# Altium PCB lps_display_rev_g.PcbDoc (part 3 of 3)
Units mil, origin at the board's own origin, x right, y up, seen from the top; angles counter-clockwise.
Board outline 5360 x 2470 mil, 2 copper layers (Top Layer, Bottom Layer), stack 6.2 mil thick; 133 components, 82 nets, 460 pads, 128 vias.
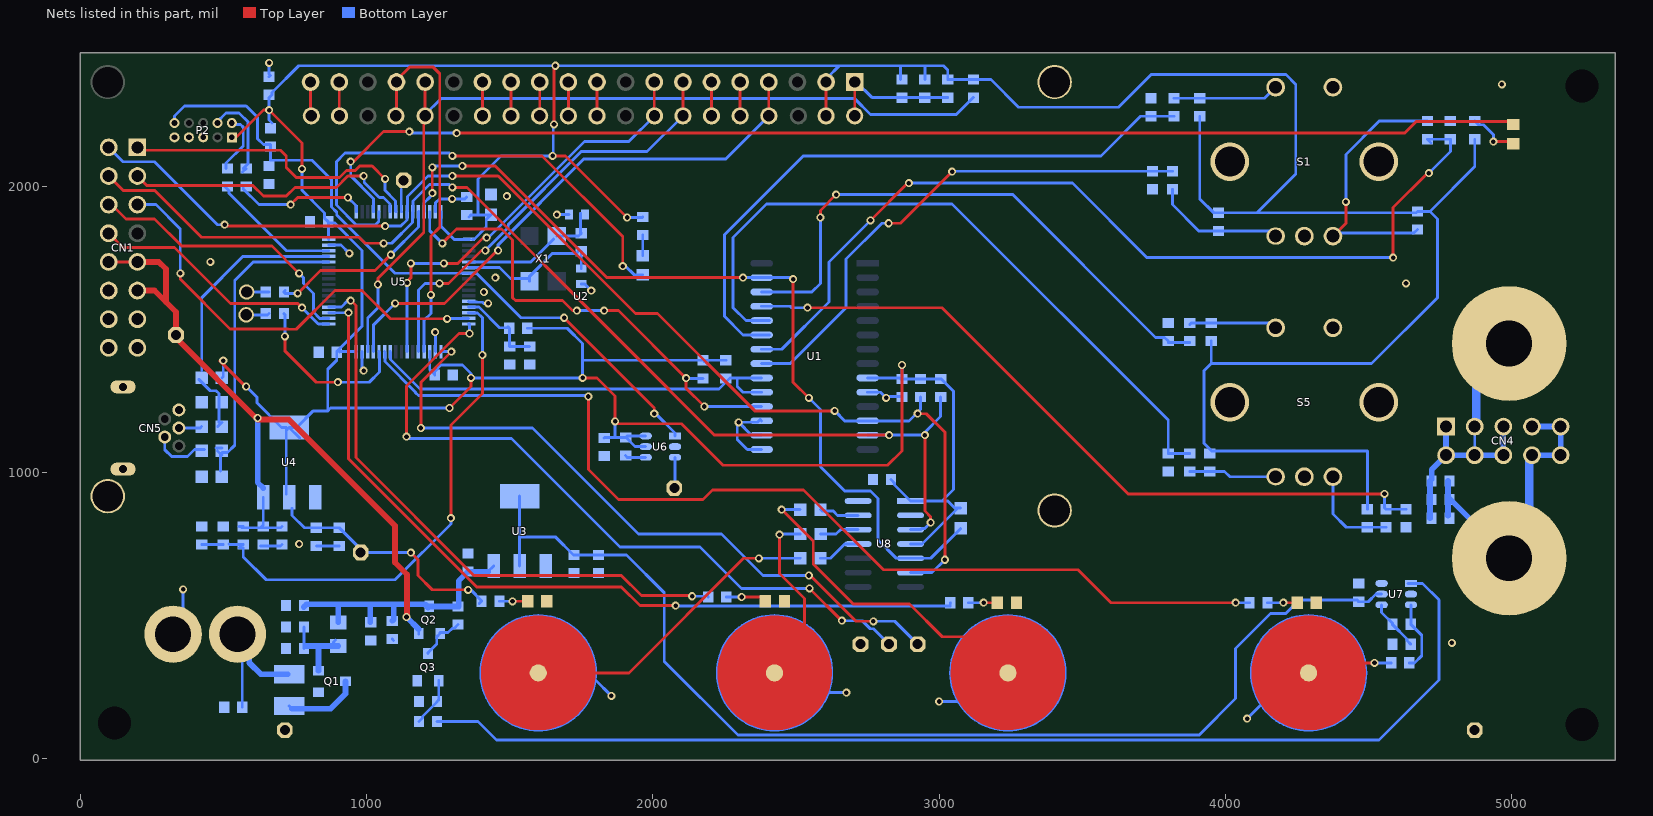
[diagram p2: the nets of this part, all layers, seen from the top]

## Part data (continued)
R33: library part "RES 1M OHM 1/10W 1% 0603", "1M 0603", Case/Package=0603, Case Code (Metric)=1608, Manufacturer=Yageo, Manufacturer Part Number=RC0603FR-071ML, Max Operating Temperature=155°C, Min Operating Temperature=-55°C, Package Quantity=5000, Power Rating=100mW, Supplier Part Number 1=311-1.00MHRCT-ND, Temperature Coefficient=100ppm/°C, Tolerance=±1%, Voltage Rating=50V, Case Code (Imperial)=0603, Category=Resistors, ComponentLink1Description=http://industrial.panasonic.com/www-cgi/jvcr13pz.cgi?E+PZ+3+AOA0002+ERJ3EKF1004V+7+WW, ComponentLink1URL=http://industrial.panasonic.com/www-cgi/jvcr13pz.cgi?E+PZ+3+AOA0002+ERJ3EKF1004V+7+WW, ComponentLink2Description=https://datasheet.ciiva.com/12555/rc0603-272842-12555388.pdf, ComponentLink2URL=https://datasheet.ciiva.com/12555/rc0603-272842-12555388.pdf, ComponentLink3Description=https://datasheet.ciiva.com/7983/443971-7983614.pdf, ComponentLink3URL=https://datasheet.ciiva.com/7983/443971-7983614.pdf, ComponentLink4Description=https://datasheet.ciiva.com/11819/0900766b80f96399-11819295.pdf, ComponentLink4URL=https://datasheet.ciiva.com/11819/0900766b80f96399-11819295.pdf, Composition="Thick Film", Depth=0.8mm, Height=0.45mm, Lead Free="Lead Free", Length=1.6mm, Military Standard=Not, Number of Pins=2, Package / Case=0603, Packaging="Tape and Reel", Pricing 1="1=0.1, 10=0.015, 100=0.006, 1000=0.0027, 2500=0.0023 (USD)", REACH SVHC="No SVHC", Resistance=1M, Resistance (Ohms)=1M, Stock 1=2416528, Supplier 1=Digi-Key, Termination=SMD/SMT, Width=0.8mm
R35 R36: library part CMP-001-0711-04, "Res Thick Film 0603 22 Ohm 5% 1/10W ±100ppm/C Molded SMD Paper T/R", Max Operating Temperature=155°C, Max Power Dissipation=100mW, Min Operating Temperature=-55°C, Package (Imperial)=0603, Package (Metric)=1608, Temperature Coefficient=100ppm/°C, Tolerance=5%, Height=550µm, Length=1.55mm, Mount="Surface Mount", Power=100mW, Power Rating=100mW, Resistance=22, Termination=SMD/SMT, Width=800µm
R37: library part "RES 1K OHM 1% 1/10W 0603", "1.0K 0603", Manufacturer="Stackpole Electronics Inc.", Manufacturer Part Number=RMCF0603FT1K00, Operating Temperature="-55°C ~ 155°C", Package / Case=0603, Power (Watts)="0.1W, 1/10W", Resistance (Ohms)=1k, Supplier Part Number 1=RMCF0603FT1K00CT-ND, Temperature Coefficient=±100ppm/°C, Tolerance=±1%, Category=Resistors, ComponentLink1Description=https://www.seielect.com/Catalog/SEI-RMCF_RMCP.pdf, ComponentLink1URL=https://www.seielect.com/Catalog/SEI-RMCF_RMCP.pdf, Composition="Thick Film", Failure Rate=-, Features="Automotive AEC-Q200", Height - Seated (Max)="0.022\" (0.55mm)", Packaging="Cut Tape (CT)", Part Status=Active, Pricing 1="1=0.1, 10=0.02, 100=0.0081, 1000=0.00364, 2500=0.00316 (USD)", RoHS="RoHS Compliant", Size / Dimension="0.061\" L x 0.031\" W (1.55mm x 0.80mm)", Stock 1=411308, Supplier 1=Digi-Key, Supplier Device Package=0603
R38: library part "RES 4.7K OHM 1/10W 5% 0603 SMD", "4.7K 0603", Manufacturer="Panasonic Electronic Components", Manufacturer Part Number=ERJ-3GEYJ472V, Package / Case=0603, Power (Watts)="0.1W, 1/10W", Resistance (Ohms)=47K, Supplier Part Number 1=P4.7KGCT-ND, Temperature Coefficient=±200ppm/°C, Tolerance=±5%, Category=Resistors, ComponentLink1Description=http://industrial.panasonic.com/www-cgi/jvcr13pz.cgi?E+PZ+3+AOA0001+ERJ3GEYJ472V+7+WW, ComponentLink1URL=http://industrial.panasonic.com/www-cgi/jvcr13pz.cgi?E+PZ+3+AOA0001+ERJ3GEYJ472V+7+WW, Composition="Thick Film", Features="Automotive AEC-Q200 Qualified", Height="0.022\" (0.55mm)", Number of Terminations=2, Packaging="Cut Tape (CT)", Pricing 1="1=0.1, 50=0.0126, 100=0.0096, 250=0.00716, 500=0.00528, 1000=0.00352, 2500=0.00297 (USD)", RoHS="RoHS Compliant", Size / Dimension="0.063\" L x 0.031\" W (1.60mm x 0.80mm)", Stock 1=1261582, Supplier 1=Digi-Key, Supplier Device Package=0603
R46: library part "RES 1K OHM 1% 1/10W 0603", "1.0K 0603", Manufacturer="Stackpole Electronics Inc.", Manufacturer Part Number=RMCF0603FT1K00, Operating Temperature="-55°C ~ 155°C", Package / Case=0603, Power (Watts)="0.1W, 1/10W", Resistance (Ohms)=51k, Supplier Part Number 1=RMCF0603FT1K00CT-ND, Temperature Coefficient=±100ppm/°C, Tolerance=±1%, Category=Resistors, ComponentLink1Description=https://www.seielect.com/Catalog/SEI-RMCF_RMCP.pdf, ComponentLink1URL=https://www.seielect.com/Catalog/SEI-RMCF_RMCP.pdf, Composition="Thick Film", Failure Rate=-, Features="Automotive AEC-Q200", Height - Seated (Max)="0.022\" (0.55mm)", Packaging="Cut Tape (CT)", Part Status=Active, Pricing 1="1=0.1, 10=0.02, 100=0.0081, 1000=0.00364, 2500=0.00316 (USD)", RoHS="RoHS Compliant", Size / Dimension="0.061\" L x 0.031\" W (1.55mm x 0.80mm)", Stock 1=411308, Supplier 1=Digi-Key, Supplier Device Package=0603
R47: library part "RES 1K OHM 1% 1/10W 0603", "1.0K 0603", Manufacturer="Stackpole Electronics Inc.", Manufacturer Part Number=RMCF0603FT1K00, Operating Temperature="-55°C ~ 155°C", Package / Case=0603, Power (Watts)="0.1W, 1/10W", Resistance (Ohms)=1.5K, Supplier Part Number 1=RMCF0603FT1K00CT-ND, Temperature Coefficient=±100ppm/°C, Tolerance=±1%, Category=Resistors, ComponentLink1Description=https://www.seielect.com/Catalog/SEI-RMCF_RMCP.pdf, ComponentLink1URL=https://www.seielect.com/Catalog/SEI-RMCF_RMCP.pdf, Composition="Thick Film", Failure Rate=-, Features="Automotive AEC-Q200", Height - Seated (Max)="0.022\" (0.55mm)", Packaging="Cut Tape (CT)", Part Status=Active, Pricing 1="1=0.1, 10=0.02, 100=0.0081, 1000=0.00364, 2500=0.00316 (USD)", RoHS="RoHS Compliant", Size / Dimension="0.061\" L x 0.031\" W (1.55mm x 0.80mm)", Stock 1=411308, Supplier 1=Digi-Key, Supplier Device Package=0603
R49: library part "RES 1K OHM 1% 1/10W 0603", "1.0K 0603", Manufacturer="Stackpole Electronics Inc.", Manufacturer Part Number=RMCF0603FT1K00, Operating Temperature="-55°C ~ 155°C", Package / Case=0603, Power (Watts)="0.1W, 1/10W", Resistance (Ohms)=1M, Supplier Part Number 1=RMCF0603FT1K00CT-ND, Temperature Coefficient=±100ppm/°C, Tolerance=±1%, Category=Resistors, ComponentLink1Description=https://www.seielect.com/Catalog/SEI-RMCF_RMCP.pdf, ComponentLink1URL=https://www.seielect.com/Catalog/SEI-RMCF_RMCP.pdf, Composition="Thick Film", Failure Rate=-, Features="Automotive AEC-Q200", Height - Seated (Max)="0.022\" (0.55mm)", Packaging="Cut Tape (CT)", Part Status=Active, Pricing 1="1=0.1, 10=0.02, 100=0.0081, 1000=0.00364, 2500=0.00316 (USD)", RoHS="RoHS Compliant", Size / Dimension="0.061\" L x 0.031\" W (1.55mm x 0.80mm)", Stock 1=411308, Supplier 1=Digi-Key, Supplier Device Package=0603
R50: library part "RES 1K OHM 1% 1/10W 0603", "1.0K 0603", Manufacturer="Stackpole Electronics Inc.", Manufacturer Part Number=RMCF0603FT1K00, Operating Temperature="-55°C ~ 155°C", Package / Case=0603, Power (Watts)="0.1W, 1/10W", Resistance (Ohms)=4.7k, Supplier Part Number 1=RMCF0603FT1K00CT-ND, Temperature Coefficient=±100ppm/°C, Tolerance=±1%, Category=Resistors, ComponentLink1Description=https://www.seielect.com/Catalog/SEI-RMCF_RMCP.pdf, ComponentLink1URL=https://www.seielect.com/Catalog/SEI-RMCF_RMCP.pdf, Composition="Thick Film", Failure Rate=-, Features="Automotive AEC-Q200", Height - Seated (Max)="0.022\" (0.55mm)", Packaging="Cut Tape (CT)", Part Status=Active, Pricing 1="1=0.1, 10=0.02, 100=0.0081, 1000=0.00364, 2500=0.00316 (USD)", RoHS="RoHS Compliant", Size / Dimension="0.061\" L x 0.031\" W (1.55mm x 0.80mm)", Stock 1=411308, Supplier 1=Digi-Key, Supplier Device Package=0603
R51 R52 R53 R54: library part "RES 1K OHM 1% 1/10W 0603", "1.0K 0603", Manufacturer="Stackpole Electronics Inc.", Manufacturer Part Number=RMCF0603FT1K00, Operating Temperature="-55°C ~ 155°C", Package / Case=0603, Power (Watts)="0.1W, 1/10W", Resistance (Ohms)=4.7K, Supplier Part Number 1=RMCF0603FT1K00CT-ND, Temperature Coefficient=±100ppm/°C, Tolerance=±1%, Category=Resistors, ComponentLink1Description=https://www.seielect.com/Catalog/SEI-RMCF_RMCP.pdf, ComponentLink1URL=https://www.seielect.com/Catalog/SEI-RMCF_RMCP.pdf, Composition="Thick Film", Failure Rate=-, Features="Automotive AEC-Q200", Height - Seated (Max)="0.022\" (0.55mm)", Packaging="Cut Tape (CT)", Part Status=Active, Pricing 1="1=0.1, 10=0.02, 100=0.0081, 1000=0.00364, 2500=0.00316 (USD)", RoHS="RoHS Compliant", Size / Dimension="0.061\" L x 0.031\" W (1.55mm x 0.80mm)", Stock 1=411308, Supplier 1=Digi-Key, Supplier Device Package=0603
U1: library part mcp23017, "I2C 16 bit Expander"
U3 U4: library part LD1117S33, "3.3 volt fixed regulator, 800mA", Supplier Part Number 1=497-1242-1-ND, Supplier 1=Digi-Key
U7: "CAP QTouch Chip"
U8: "QTouch IC"
X1: library part "CRYSTAL 8MHZ ABM3", "8Mhz ABM3 Parallel Load Crystal", ESR (Equivalent Series Resistance)="200 Ohm", Frequency=8MHz, Frequency Stability=±50ppm, Frequency Tolerance=±20ppm, Load Capacitance=18pF, Manufacturer="Abracon Corporation", Manufacturer Part Number=ABM3B-8.000MHZ-B2-T, Operating Mode=Fundamental, Operating Temperature="-20°C ~ 70°C", Package / Case="4-SMD, No Lead (DFN, LCC)", Ratings=-, Supplier Part Number 1=535-9720-1-ND, Category="Crystals and Oscillators", ClassName="Master Clock", ComponentLink1Description=http://www.abracon.com/Resonators/abm3b.pdf, ComponentLink1URL=http://www.abracon.com/Resonators/abm3b.pdf, Height="0.043\" (1.10mm)", Mounting Type="Surface Mount", Packaging="Cut Tape (CT)", Pricing 1="1=1.04, 10=0.92, 50=0.8588, 100=0.76, 500=0.7182 (USD)", RoHS="RoHS Compliant", Size / Dimension="0.197\" L x 0.126\" W (5.00mm x 3.20mm)", Stock 1=22545, Supplier 1=Digi-Key, Type="MHz Crystal"

## Free pads (board coordinates)
  round 110 hole 115 unplated: 0(120,125) 0(5245,120) 0(5245,2350)

## Via types
v1: diameter 28, hole 16, Top Layer to Bottom Layer, 128 vias

## Nets (pads, with @x,y where several pads share a name; then routed paths per layer and width w, separated by ;. In a path a pad name is that pad's centre, name@x,y a point inside that pad or via, vN(x,y) a via of type N, cw(c..) or ccw(c..) an arc to the next point about the centre after c; other vN are vias at no path point)
3V3: 3V3.1 C1.1 C2.1 C3.1 C4.1 C14.1 C15.1 C21.1 C22.1 C23.1 C24.1 C25.1 C26.1 C33.1 C43.1 FB2.1 P2.1 R5.2 R6.2 R7.2 R8.2 R9.2 R10.2 R11.2 R14.2 R15.2 R16.2 R21.2 R26.2 R31.1 R32.2 R38.2 R47.2 R48.2 R54.1 U1.9 U2.2 U4.2 U4.4 U5.1 U5.19 U5.32 U5.48 U5.64 U6.5 U6.6 U8.1 U8.4 | length 18276.7
  Top Layer w10: v1@487.72,1390 v1@571.36,1306.36 ; P2.1@545,2170 640,2265 v1(660,2265) 775,2150 v1(775,2060) ; v1(1155,720) 1180,695 1180,640 1230,590 v1(1355,590) ; v1(1290,1225) 1365,1300 v1(1365,1330) ; v1(1650,2105) 1695,2105 v1(1910,1890) ; v1(1655,2215) 1655,2415 v1(1660,2420) ; v1(1755,1330) 1805,1330 1868.25,1266.75 v1(1868.25,1178.25) 1876.5,1170 2100,1170 2245,1025 2820,1025 2870,1075 v1(2870,1375)
  Bottom Layer w10: R47.2@495.43,1330 500,1334.57 v1(500,1390) ; v1(580,1300) 617.5,1262.5 617.5,1242.97 703.42,1157.05 U4.4@720,1157.05 ; 670,2220 660,2230 v1(660,2265) 660,2308.5 670,2318.5 670,2326.54 763.46,2420 v1(1660,2420) 2650.86,2420 ; U4.2@720,925 720,1147.05 U4.4@730,1157.05 ; U4.2@740,875 740,850 783.5,806.5 C15.1@825,806.5 C14.1@905,806.5 980,731.5 980,725.75 985.75,720 v1(1155,720) ; U4.4@767.32,1119.72 U4.4@730,1157.05 ; v1(775,2060) 775,1985 853.78,1906.22 853.78,1887.72 C25.1@866.5,1875 866.5,1873.03 C25.1@867.64,1871.89 ; U5.48@868.54,1813.54 867.64,1814.45 C25.1@867.64,1871.89 ; C24.1@906.5,1420 908.31,1421.81 U5.32@965,1421.81 ; U5.19@1220.9,1421.81 1220.9,1359.57 C26.1@1238.5,1341.97 ; C26.1@1238.5,1340 C26.1@1238.5,1341.97 ; U5.64@1260.28,1910 1260.28,1859.72 1306.46,1813.54 U5.1@1356.73,1813.54 1359.16,1813.54 U5.1@1360,1814.38 ; v1(1290,1225) 875,1225 865,1215 ; v1(1355,590) 1363.98,590 1402.01,551.97 R21.2@1402.01,550 R21.2@1393.78,541.77 ; C23.1@1358.33,1892.15 1364.37,1898.19 1390,1898.19 ; U5.1@1370,1813.75 1375.52,1813.75 1418.35,1856.58 1418.35,1882.91 C22.1@1433.62,1898.19 ; C22.1@1435,1899.57 C22.1@1433.62,1898.19 ; FB2.1@1561.5,1503.5 1701.5,1503.5 1755,1450 1755,1395 ; v1(1655,2215) 1652.5,2212.5 1652.5,2107.5 v1(1650,2105) 1470,2105 1390,2025 1390,1898.19 ; C33.1@1830,1120 1831.5,1121.5 1868.25,1121.5 ; v1(1868.25,1178.25) 1868.25,1121.5 ; v1(1910,1890) 1963.5,1890 R26.2@1965,1891.5 ; U6.5@1975,1090 1938.35,1090 1931.28,1097.07 1931.28,1097.19 1906.97,1121.5 R38.2@1905,1121.5 ; U6.6@1975,1127.4 1910.91,1127.4 R38.2@1905,1121.5 ; R11.2@2175,1391.5 1758.5,1391.5 1755,1395 ; R11.2@2180,1386.5 2185,1391.5 R8.2@2255,1391.5 ; U2.2@2610,2365 2610,2379.14 2650.86,2420 ; U1.9@2750.08,1330 2865,1330 2865,1326.5 C1.1@2870,1326.5 R10.2@2935,1326.5 R9.2@3005,1326.5 3006.97,1326.5 3050,1283.46 3050,940 3010,900 ; C43.1@2831.5,975 2844.21,962.28 2844.21,955.79 U8.1@2900,900 3010,900 ; C4.1@2865,2371.5 2865,2420 ; C1.1@2870,1330 v1(2870,1375) ; U8.4@2900,750 2939.79,750 R54.1@3065.22,875.43 ; C2.1@2950,2371.5 2950,2420 ; R54.1@3075,875.43 R54.1@3065.22,875.43 ; R48.2@3120,2371.5 R48.2@3121.97,2371.5 ; R6.2@3910,2243.5 3910,1955 3958.5,1906.5 R7.2@3975,1906.5 4110,1906.5 ; R15.2@3950,1458.5 3950,1380 ; R14.2@4495,871.5 4495,1075 3951.5,1075 3925,1101.5 3925,1355 3950,1380 ; R32.2@4870,2163.5 4870,2067.99 4713.5,1911.5 ; U4.4@730,1157.05 756.57,1157.05 814.53,1215 865,1215 ; 865,1215 865,1360 896.5,1391.5 C24.1@896.5,1420 896.5,1421.97 985,1510.47 985,1775 888.11,1871.89 C25.1@867.64,1871.89 ; C26.1@1238.5,1341.97 1238.5,1353.5 1260,1375 1335,1375 1365,1345 v1(1365,1330) v1(1755,1330) 1755,1395 ; 1390,1898.19 C22.1@1433.62,1898.19 ; 1868.25,1121.5 R38.2@1905,1121.5 ; 2650.86,2420 2865,2420 ; 2865,2420 2950,2420 ; 2950,2420 3015,2420 3030,2405 C3.1@3030,2371.5 R48.2@3121.97,2371.5 ; 3010,900 3030,900 3054.57,875.43 R54.1@3065.22,875.43 ; R48.2@3121.97,2371.5 3180.51,2371.5 3277.01,2275 3625.87,2275 3740.37,2389.5 4210.5,2389.5 4245,2355 4245,2041.5 4110,1906.5 ; 3950,1380 4510,1380 4740,1610 4740,1885 4713.5,1911.5 ; 4110,1906.5 4665,1906.5 R5.2@4670,1911.5 4713.5,1911.5
8MH_XTAL1: C20.1 R33.1 U5.5 X1.3 | length 491.3
  Bottom Layer w10: U5.5@1356.93,1735 U5.5@1356.73,1734.8 1574.29,1734.8 ; 1574.04,1735.06 X1.3@1653.78,1814.8 ; X1.3@1664.49,1825 1740,1825 R33.1@1750,1835 1747.56,1837.44 1747.56,1905
8MH_XTAL2: C19.1 R33.2 U5.6 X1.1 | length 521.8
  Bottom Layer w10: U5.6@1356.73,1715.12 1464.88,1715.12 1502.48,1677.52 X1.1@1570,1677.52 ; X1.1@1570,1667.52 X1.1@1570,1677.52 ; C19.1@1750,1712.56 R33.2@1750,1772.01 1740,1772.01 1732.99,1765 1650,1765 1570,1685 X1.1@1570,1677.52
+VIN: C8.1 C9.1 C10.1 C34.1 FB1.2 Q2.3 R1.2 U3.3 | length 978.4
  Bottom Layer w10: C9.1@1013.03,476.5 C9.1@1015,476.5 ; C10.1@1090,485 C10.1@1090,492.5 ; Q2.3@1220,532.24 Q2.3@1220.75,531.5 ; R1.2@1320,531.5 R1.2@1321.97,531.5 ; U3.3@1425,653.5 U3.3@1444.45,672.95
  Bottom Layer w20: C8.1@781.5,530 791.5,540 901.64,540 ; FB1.2@901.64,476.57 901.64,540 ; C9.1@1013.03,476.5 1013.03,536.97 1010,540 ; C10.1@1090,481.5 1095,486.5 1095,540 ; Q2.3@1215,527.24 1215,530.2 1208.27,536.93 1205.31,536.93 1202.24,540 1095,540 ; Q2.3@1220.75,531.5 R1.2@1320,531.5 ; R1.2@1321.97,531.5 1321.97,620.47 C34.1@1355,653.5 U3.3@1425,653.5 ; 901.64,540 1010,540 ; 1010,540 1095,540
+VIN_SW: +VIN_SW.1 C12.1 C13.1 CN1.5 CN1.6 CN1.13 CN1.14 Q2.2 R23.2 U4.3 | length 2553.4
  Top Layer w10: CN1.13@100,1735 CN1.5@200,1735 ; v1(1140,495) v1@1141.4,496.4
  Top Layer w20: CN1.6@200,1635 260,1635 300,1595 ; CN1.5@200,1735 275,1735 300,1710 300,1595 ; v1@1141.4,496.4 1141.4,643.6 1100,685 1100,813.89 728.89,1185 620,1185 335,1470 +VIN_SW.1@335,1480 335,1560 300,1595
  Bottom Layer w10: R23.2@555,811.5 R23.2@570,811.5 ; R23.2@565,806.5 C13.1@630,806.5 ; U4.3@639.45,912.95 639.45,815.94 C13.1@630,806.5 ; C12.1@705,811.5 700,806.5 C13.1@630,806.5 ; Q2.2@1182.6,434.8 Q2.2@1182.6,437.76 Q2.2@1182.6,452.4
  Bottom Layer w20: v1(620,1190) 620,965 U4.3@640,945 ; v1(1140,495) Q2.2@1182.6,452.4
/CAP_T_INT: R54.2 U1.27 U5.61 U8.5 | length 3022.3
  Top Layer w10: v1(1230,1975) v1(1230,2065) ; v1(1335,2070) 1450,2070 1840,1680 v1(2315,1680) ; v1(2490,1675) 2490,1315 v1(2545,1260)
  Bottom Layer w10: U5.61@1201.22,1910 1201.22,1941.17 1222.67,1962.62 ; v1(1230,2065) 1235,2070 v1(1335,2070) ; v1(2315,1680) U1.27@2380,1680 2485,1680 v1(2490,1675) ; v1(2545,1260) 2585,1220 2585,1020 2670,935 2760,935 2785.95,909.05 2785.95,764.05 2850,700 U8.5@2900,700 2970.43,700 R54.2@3075,804.57
/INT: R8.1 U1.19 U1.20 U5.26 | length 1506.2
  Bottom Layer w10: U5.26@1083.11,1421.81 1084.02,1420.91 1084.02,1394.09 1187.11,1291 2231,1291 2270,1330 2295,1330 ; U1.19@2380,1280 2315,1280 2295,1300 2295,1330 ; U1.20@2380,1330 2295,1330
/RST_MCP23017: R11.1 U1.18 U5.62 | length 1718.9
  Top Layer w10: v1(1265,1800) 1315,1850 1471.77,1850 1510,1811.77 1510,1610 1520,1600 1685,1600 1720,1565 v1(1735,1565) ; v1(1830,1565) 1880,1565 v1(2116.19,1328.81) 2116.19,1293.81 v1(2180,1230)
  Bottom Layer w10: U5.62@1220.9,1910 1220.9,1844.09 v1(1265,1800) ; v1(1735,1565) v1(1830,1565) ; v1@2115.88,1329.12 v1(2116.19,1328.81) 2116.5,1328.5 R11.1@2175,1328.5 ; v1(2180,1230) U1.18@2380,1230
/RST_OLED: R48.1 U2.16 U5.30 | length 2906.1
  Top Layer w10: v1(1040,1656.25) 1040,1678.23 1200,1838.23 1200,2240 U2.16@1205,2244.99 U2.16@1205,2255
  Bottom Layer w10: U5.30@1004.37,1421.81 1004.37,1539.37 1040,1575 v1(1040,1656.25) ; U2.16@1205,2244.99 1205,2250 1260,2305 2705,2305 2760,2250 3059.53,2250 3118.03,2308.5 R48.1@3120,2308.5
Current_Limit: CN1.11 U5.34 | length 982.8
  Top Layer w10: CN1.11@100,1935 110,1935 160,1885 260,1885 355,1790 670,1790 v1(765,1695)
  Bottom Layer w10: v1(765,1695) 780,1680 780,1660 815,1625 815,1560 837.05,1537.95 U5.34@868.54,1537.95
D/C_OLED: U2.4 U5.29 | length 1787.6
  Top Layer w10: v1(1100,1590) 1272.02,1590 1457.02,1775 v1(1460,1775)
  Bottom Layer w10: U5.29@1024.06,1421.81 1024.06,1514.05 v1(1100,1590) ; v1(1460,1775) 1460,1794.96 1760.04,2095 2255,2095 U2.4@2405,2244.99
DEBUG_LED: LED2.2 U5.53 | length 1685.7
  Top Layer w10: v1(1300,2105) 1613.23,2105 1895,1823.23 v1(1895,1720)
  Bottom Layer w10: U5.53@1043.74,1910 1042.83,1909.09 1042.83,1875.86 1031.98,1865 963.5,1865 895,1933.5 895,2085 925,2115 1290,2115 v1(1300,2105) ; v1(1895,1720) 1905,1720 1935,1690 LED2.2@1965,1690
GND: C1.2 C2.2 C3.2 C4.2 C7.2 C8.2 C9.2 C10.2 C11.2 C12.2 C13.2 C14.2 C15.2 C16.2 C17.2 C18.2 C19.2 C20.2 C21.2 C22.2 C23.2 C24.2 C25.2 C26.2 C27.2 C28.2 C29.2 C30.2 C31.2 C32.2 C33.2 C34.2 C36.2 C37.2 C39.2 C40.2 C41.2 C43.2 CN1.7 CN1.8 CN1.15 CN1.16 CN5.0 CN5.5 CS1.2 CS2.2 CS3.2 CS4.2 GND1.1 GND2.1 GND3.1 LED1.2 LED4.2 LED5.2 LED6.2 P1.1 P2.5 P2.7 P2.9 Q1.1 Q3.2 R12.2 R18.1 R37.1 R46.1 R49.1 S1.2 S1.4 S1.5 S1.7 S5.2 S5.4 S5.5 S5.7 U1.10 U1.15 U1.16 U1.17 U2.1@96.73,916.88 U2.1@2705,2244.99 U2.1@2705,2363.1 U2.1@3403.19,867.04 U2.1@3403.19,2363.1 U2.5 U2.6 U2.10 U2.11 U2.12 U2.13 U2.14 U2.19 U2.20 U3.1 U4.1 U5.12 U5.18 U5.31 U5.47 U5.63 U6.2 U7.2 U7.6 U8.2 U8.14 | length 2278
  Bottom Layer w10: P1.1@335,435 335,466.62 360,491.62 v1(360,591.62) ; C13.2@630,743.5 700,743.5 C12.2@705,748.5 ; C21.2@660,2381.5 665,2386.5 660,2391.5 v1(660,2430) ; C15.2@825,743.5 C14.2@905,743.5 ; U5.47@868.54,1793.86 911.14,1793.86 v1(940,1765) ; U5.31@984.68,1421.81 984.68,1360.32 v1(990,1355) ; C10.2@1090,418.5 C10.2@1095,413.5 ; v1(1240,1490) 1240.59,1489.41 U5.18@1240.59,1421.81 ; U5.63@1240.59,1910 1241.5,1910.91 1241.5,1941.5 1255,1955 v1(1299.25,1955) 1343.5,1955 C23.2@1350,1961.5 ; U5.12@1356.73,1597.01 1358.51,1595.23 1385.32,1595.23 1386.23,1594.32 1404.72,1594.32 1409.04,1590 v1(1425,1590) ; CS4.2@1600,300 1645,300 1650,300 1700,300 1750,300 1775,300 ; v1(1665,1900) C20.2@1707.44,1900 ; C19.2@1750,1657.44 1762.56,1657.44 v1(1785,1635) ; 1798.6,276.4 v1(1855,220) ; v1@2295,1170 2295,1115 2330,1080 U1.15@2380,1080 ; U1.16@2380,1130 2345,1130 v1(2300,1175) 2365,1175 2375,1185 U1.17@2380,1180 ; 2610,225 2610.68,225.68 2616,231 v1(2676,231) v1@2680,235 ; U2.1@2710,2365 2766.5,2308.5 C4.2@2870,2308.5 C2.2@2950,2308.5 C3.2@3030,2308.5 ; U1.10@2750.08,1280 2795,1280 v1(2815,1260) 2820,1265 C1.2@2865,1265 ; v1(3000,200) 3066.79,200 3070,200 3090,200 ; v1(4075,140) 4123.78,188.78 4135,200 4140,200 4190,200
  other v1: 4790,405 765,750 1410,1630 4630,1660 1450,1680 455,1735 1490,1965 4965,2355
I2C_SCL: CN1.9 R10.1 U1.12 U5.58 U8.6 | length 4207.1
  Top Layer w10: CN1.9@100,2120.93 CN1.9@100,2135 ; v1@500,1865 505,1860 v1(1065,1860) ; v1(1300,2035) 1460,2035 1940,1555 2015.88,1555 2355.88,1215 v1(2635,1215) ; v1(2925,1205) 2955,1205 3020,1140 v1(3020,695)
  Bottom Layer w10: CN1.9@100,2135 150,2085 260,2085 480,1865 v1(505,1865) ; v1(1065,1860) 1120,1860 1141.26,1881.26 1141.26,1909.09 U5.58@1142.16,1910 1143.07,1910.91 1143.07,1963.07 1215,2035 v1(1300,2035) ; v1(2635,1215) 2670,1180 U1.12@2750.08,1180 2895,1180 2935,1220 R10.1@2935,1263.5 ; U8.6@2900,650 2975,650 v1(3020,695)
I2C_SDA: CN1.10 R9.1 U1.13 U5.59 U8.3 | length 4062.4
  Top Layer w10: CN1.10@100,2035 150,1985 260,1985 424,1821 974,1821 995,1800 v1(1060,1800) ; v1(1300,1995) 1350.81,1995 1893.1,1452.71 2215.81,1130 v1(2825,1130) ; v1(2950,1130) 2950,865 2970,845 v1(2970,825)
  Bottom Layer w10: v1(1060,1800) 1088.45,1800 1160.94,1872.5 1160.94,1909.09 1162.76,1910.91 1162.76,1947.5 1220.25,2005 1290,2005 v1(1300,1995) ; U1.13@2750.08,1130 v1(2825,1130) v1(2950,1130) 2950,1140 3005,1195 R9.1@3005,1263.5 ; U8.3@2900,800 2934.54,800 2939.02,804.47 2949.47,804.47 v1(2970,825)
I_ENC_A: C31.1 R27.2 U1.24 | length 2463.6
  Bottom Layer w10: U1.24@2407.56,1530 U1.24@2380,1530 2325,1530 2280,1575 2280,1820 2397.5,1937.5 3045,1937.5 3800,1182.5 C31.1@3800,1066.5 R27.2@3875,1066.5
I_ENC_B: C27.1 R28.2 U1.25 | length 2616.9
  Top Layer w10: v1(2540,1575) 3010,1575 3660,925 v1(4555,925)
  Bottom Layer w10: U1.25@2380,1580 2480,1580 2485,1575 v1(2540,1575) 2495,1575 ; v1(4555,925) 4555,876.5 R28.2@4560,871.5 C27.1@4630,871.5
I_ENC_SW: C39.1 R45.1 U1.26 | length 1997.1
  Top Layer w10: v1(2585,1890) 2585,1915 v1(2640,1970)
  Bottom Layer w10: U1.26@2380,1630 2555,1630 2585,1660 v1(2585,1890) ; v1(2640,1970) 3257.08,1970 3755.86,1471.22 3787.28,1471.22 C39.1@3800,1458.5 ; C39.1@3800,1453.5 R45.1@3875,1453.5
I_Sample: CN1.3 U5.15 | length 1538.9
  Top Layer w10: v1(350,1695) 350,1675 524,1501 725.77,1501 726.77,1500 755,1500 890,1635 985,1635 1083.52,1536.48 v1(1281.48,1536.48)
  Bottom Layer w10: CN1.3@200,1935 265,1935 350,1850 v1(350,1695) ; v1@1280,1535 v1(1281.48,1536.48) 1282.95,1537.95 U5.15@1356.73,1537.95
MEM1_LED: R3.1 U5.35 | length 2906.8
  Top Layer w10: v1(937.36,1557.64) 937.36,1047.64 1385,600 1890,600 1955,535 v1(2080,535)
  Bottom Layer w10: U5.35@868.54,1557.64 v1(937.36,1557.64) ; v1(2080,535) 2081.69,533.31 3038.5,533.31 R3.1@3038.5,545 R3.1@3040,543.5
MEM2_LED: R4.1 U5.36 | length 2068.1
  Top Layer w10: v1(945,1600) 946.01,1600 963.36,1582.65 963.36,1051.64 1375,640 1890,640 1960,570 v1@2132.5,570
  Bottom Layer w10: U5.36@868.54,1577.32 912.32,1577.32 935,1600 v1(945,1600) ; v1(2137.5,567.5) 2191,567.5 R4.1@2193.5,565
Net1_1: 1.1 U5.57 | length 78.8
  Bottom Layer w10: 1121.57,1988.43 1121.57,1910.91 U5.57@1122.48,1910
Net/MR_1: /MR.1 U6.3 | length 108.6
  Bottom Layer w10: /MR.1@2075,945 2077.36,947.36 U6.3@2077.36,1052.6
NetBOOT1_1: BOOT1.1 R25.1 | length 78.5
  Bottom Layer w10: BOOT1.1@581.5,1630 R25.1@660,1630
NetBOOT2_1: BOOT2.1 R34.2 | length 75.6
  Bottom Layer w10: BOOT2.1@586.5,1550 655,1550 R34.2@660,1555
NetC5_1: C5.1 C6.1 CN4.1 CN4.2 CN4.3 CN4.6 CN4.7 CN4.8 J2.1 R17.2 | length 1303.7
  Bottom Layer w10: C6.1@4713.5,970 C6.1@4720,976.5 ; CN4.7@4870,1060 CN4.2@4870,1160 ; J2.1@4875,1370 5050,1545 5090,1545 J2.1@5035,1490
  Bottom Layer w20: R17.2@4713.5,840 4713.5,905 C6.1@4713.5,970 ; C6.1@4720,976.5 4720,1010 CN4.6@4770,1060 ; CN4.1@4770,1160 CN4.6@4770,1060 ; CN4.3@4970,1160 CN4.8@4970,1060 CN4.7@4870,1060 CN4.6@4770,1060
  Bottom Layer w30: CN4.2@4875,1175 J2.1@4875,1370
NetC5_2: C5.2 C6.2 CN4.4 CN4.5 CN4.9 CN4.10 J1.1 R17.1 | length 1111.1
  Bottom Layer w10: C5.2@4776.5,905 C5.2@4785,905 ; J1.1@4990,700 J1.1@5060.05,770.05 ; CN4.9@5060.05,1050.05 CN4.9@5070,1060
  Bottom Layer w20: R17.1@4776.5,848.5 C5.2@4776.5,903.03 ; C5.2@4776.5,905 C6.2@4776.5,970 ; C5.2@4785,905 J1.1@4990,700 ; CN4.9@5070,1060 CN4.10@5170,1060 CN4.5@5170,1160 CN4.4@5070,1160
  Bottom Layer w30: J1.1@5060.05,770.05 CN4.9@5060.05,1050.05
NetC7_1: C7.1 C11.1 FB1.1 Q1.2 | length 298
  Bottom Layer w10: C11.1@781.5,460 C7.1@781.5,385 C7.1@790.38,393.89 ; 830,393.89 832.76,391.13 ; FB1.1@884.22,406.39 FB1.1@892.35,414.52
  Bottom Layer w20: C7.1@790.38,393.89 830,393.89 FB1.1@901.64,393.89 ; Q1.2@832.76,307.4 832.76,391.13
NetC16_1: C16.1 C41.1 R18.2 U3.2 U3.4 U7.5 | length 3993
  Bottom Layer w10: U3.2@1535,672.95 1535,775 ; U3.4@1535,917.05 1535,775 ; U7.5@4545,575 4525,575 4498.5,548.5 C41.1@4465,548.5 4458.5,555 4257.98,555 4210,507.02 4157.02,507.02 4035,385 4035,210 3908,83 2297,83 2040,340 2040,580 1908.5,711.5 R18.2@1810,711.5 C16.1@1725,711.5 1723.03,711.5 1659.53,775 1535,775
NetC17_1: C17.1 C18.1 FB2.2 U5.13 | length 302.9
  Bottom Layer w10: U5.13@1356.73,1577.32 1392.68,1577.32 1465,1505 FB2.2@1488.5,1505 ; FB2.2@1493.5,1508.5 FB2.2@1498.5,1503.5 1500,1502.01 C17.1@1500,1440 C18.1@1570,1440
NetC42_1: C42.1 R49.2 U7.4 | length 179.6
  Bottom Layer w10: U7.4@4545,537.6 4545,510.47 4583.5,471.97 C42.1@4583.5,470 4583.5,468.03 4633.78,417.76 4633.78,412.72 R49.2@4646.5,400
NetC42_2: C42.2 R50.2 U7.3 | length 247.8
  Bottom Layer w10: R50.2@4641.5,335 4660,335 4685,360 4685,431.5 C42.2@4646.5,470 4647.36,470.87 U7.3@4647.36,537.6
NetCN5_2: CN5.2 R35.1 | length 203.9
  Bottom Layer w10: CN5.2@295.67,1123.5 295.67,1079.33 320,1055 374.57,1055 399.57,1080 R35.1@435,1080
NetCN5_3: CN5.3 R36.1 | length 81.8
  Bottom Layer w10: CN5.3@344.88,1155 419.57,1155 R36.1@424.57,1160
NetCS1_1: CS1.1 R50.1 | length 203
  Top Layer w10: 4390,300 4425,335 v1(4520,335)
  Bottom Layer w10: v1(4520,335) R50.1@4578.5,335
NetCS2_1: CS2.1 R51.1 | length 1032.4
  Top Layer w10: v1(2450,870) 2560,760 2560,680 2700,540 2896.77,540 3010.88,425.88 3092.61,425.88 3159.36,359.14
  Bottom Layer w10: v1(2450,870) R51.1@2514.57,870
NetCS3_1: CS3.1 R52.1 | length 594.4
  Top Layer w10: v1(2442.5,782.5) 2442.5,647.5 2530,560 2530,305 2525,300
  Bottom Layer w10: v1(2442.5,782.5) 2445,785 R52.1@2515,785
NetCS4_1: CS4.1 R53.1 | length 980.3
  Top Layer w10: 1700,300 1916.77,300 2316.77,700 v1(2370,700)
  Bottom Layer w10: v1(2370,700) R53.1@2514.57,700
NetF1_1: F1.1 P1.2 R46.2 | length 571
  Bottom Layer w10: P1.2@550,370 P1.2@550,435 P1.2@566.5,418.5 ; R46.2@566.5,180 P1.2@566.5,418.5 ; P1.2@590.6,394.4 P1.2@566.5,418.5
  Bottom Layer w20: P1.2@590.6,394.4 590.6,335.6 631.32,294.88 F1.1@725,294.88
NetF1_2: F1.2 Q1.3 | length 265.7
  Bottom Layer w10: F1.2@730,184.88 F1.2@739.88,175
  Bottom Layer w20: F1.2@739.88,175 875,175 927.24,227.24 Q1.3@927.24,270
NetLED1_1: LED1.1 R21.1 | length 98.1
  Top Layer w10: v1(1510,550) LED1.1@1563.07,550
  Bottom Layer w10: R21.1@1465,550 v1(1510,550)
NetLED2_1: LED2.1 R26.1 | length 71.6
  Bottom Layer w10: LED2.1@1965,1756.93 R26.1@1965,1828.5
NetLED3_1: LED3.1 R32.1 | length 182.1
  Top Layer w10: v1(4935,2155) 4998.07,2155 LED3.1@5005,2148.07
  Bottom Layer w10: R32.1@4870,2226.5 4882.72,2213.78 4901.22,2213.78 4935,2180 v1(4935,2155)
NetLED4_1: LED4.1 R3.2 | length 101.6
  Top Layer w10: v1(3155,545) LED4.1@3203.07,545
  Bottom Layer w10: R3.2@3101.5,545 v1(3155,545)
NetLED5_1: LED5.1 R4.2 | length 141.6
  Top Layer w10: v1(2310,565) LED5.1@2398.07,565
  Bottom Layer w10: R4.2@2256.5,565 v1(2310,565)
NetLED6_1: LED6.1 R13.2 | length 101.6
  Top Layer w10: v1(4201.93,545) LED6.1@4250,545
  Bottom Layer w10: R13.2@4146.5,545 v1@4200,545
NetP2_2: P2.2 R30.1 | length 214.6
  Bottom Layer w10: R30.1@510,2061.5 510,2080 570,2140 570,2205 559.78,2215.22 534.78,2215.22 P2.2@530,2220
NetP2_4: P2.4 R29.1 | length 324.4
  Bottom Layer w10: P2.4@477.5,2222.5 510,2255 555,2255 587,2223 587,2078.5 R29.1@570,2061.5 ; R29.1@567.5,2049 R29.1@580,2061.5 R29.1@578.03,2061.5
NetQ2_1: Q2.1 Q3.3 R1.1 | length 165.1
  Bottom Layer w10: Q3.3@1215,367.24 1215,370.2 1245.67,400.87 1245.67,426.02 Q2.1@1257.4,437.76 1257.4,440.71 1285,440.71 1300.08,455.79 1307.28,455.79 R1.1@1320,468.5
NetQ3_1: Q3.1 R2.1 R12.1 | length 171.3
  Bottom Layer w10: R2.1@1183.5,130 1196.22,142.72 1196.22,147.76 1246.5,198.03 R12.1@1246.5,200 1252.4,205.91 Q3.1@1252.4,272.76
NetR2_2: R2.2 U7.1 | length 4022.8
  Bottom Layer w10: R2.2@1246.5,130 1390,130 1454,66 4536,66 4745,275 4745,555 4687.6,612.4 U7.1@4647.36,612.4 U7.1@4637.52,612.4
NetR5_1: R5.1 R43.1 S1.3 | length 941.6
  Top Layer w10: S1.3@4375,1825 4420,1870 v1(4420,1945)
  Bottom Layer w10: S1.3@4375,1825 4389.88,1825 4400.67,1835.79 4657.28,1835.79 R5.1@4670,1848.5 ; v1(4420,1945) 4420,2110 4536.5,2226.5 R43.1@4705,2226.5
NetR6_1: R6.1 R42.2 S1.6 | length 370.9
  Bottom Layer w10: R42.2@3820,2306.5 R6.1@3910,2306.5 4136.5,2306.5 S1.6@4175,2345
NetR7_1: R7.1 R41.1 S1.1 | length 459.1
  Bottom Layer w10: R41.1@3815,1988.5 3815,1935 3906.5,1843.5 R7.1@3975,1843.5 4156.5,1843.5 S1.1@4175,1825
NetR14_1: R14.1 R28.1 S5.3 | length 334.3
  Bottom Layer w10: S5.3@4375,985 4375,855 4421.5,808.5 R14.1@4495,808.5 R28.1@4560,808.5
NetR15_1: R15.1 R45.2 S5.6 | length 308.9
  Bottom Layer w10: R45.2@3875,1516.5 3880,1521.5 R15.1@3950,1521.5 4158.5,1521.5 S5.6@4175,1505
NetR16_1: R16.1 R27.1 S5.1 | length 307.7
  Bottom Layer w10: R27.1@3875,1003.5 R16.1@3945,1003.5 3996.5,1003.5 4015,985 S5.1@4175,985
NetR25_2: R25.2 U5.60 | length 629.8
  Top Layer w10: v1(760,1625) 840,1705 1030,1705 v1(1085,1760)
  Bottom Layer w10: R25.2@716.5,1635 R25.2@711.5,1630 716.5,1625 v1(760,1625) ; v1(1085,1760) 1181.54,1856.53 U5.60@1181.54,1910 U5.60@1182.44,1910.91
NetR34_1: R34.1 U5.28 | length 595.6
  Top Layer w10: v1(715,1475) 715,1425 825,1315 v1(900,1315)
  Bottom Layer w10: R34.1@711.5,1555 715,1551.5 v1(715,1475) ; v1(900,1315) 1010,1315 1045.52,1350.52 1045.52,1420.03 U5.28@1043.74,1421.81 U5.28@1042.83,1422.72
NetR38_1: R38.1 U6.4 | length 72.4
  Bottom Layer w10: R38.1@1905,1058.5 1910.91,1052.6 U6.4@1975,1052.6
NetR51_2: R51.2 U8.13 | length 139.9
  Bottom Layer w10: R51.2@2585.43,870 2590.43,865 2630,865 2645,850 U8.13@2717.01,850
NetR52_2: R52.2 U8.12 | length 137.4
  Bottom Layer w10: R52.2@2585.87,785 2640,785 2655,800 U8.12@2717.01,800
NetR53_2: R53.2 U8.11 | length 152.3
  Bottom Layer w10: R53.2@2585.43,700 2620,700 2670,750 U8.11@2717.01,750
NRST: C28.1 P2.10 R31.2 U5.7 U6.1 | length 2419.7
  Top Layer w10: v1(1690,1540) 2005,1225 v1(2005,1205)
  Bottom Layer w10: P2.10@330,2220 330,2245 365,2280 580,2280 620,2240 620,2165 640,2145 665,2145 R31.2@665,2138.5 665,2090 810,2090 878,2022 878,1926.46 896.21,1908.25 896.21,1898.79 1099.57,1695.43 U5.7@1356.73,1695.43 1357.52,1694.65 1385.35,1694.65 1540,1540 v1(1690,1540) ; v1(2005,1205) 2010,1205 2077.36,1137.64 U6.1@2077.36,1127.4
OC_LED: LED3.2 U5.52 | length 4314.3
  Top Layer w10: v1(945,2085) 955,2085 1060,2190 v1(1150,2190) ; v1(1315,2185) 4625.86,2185 4665.86,2225 LED3.2@4995,2225
  Bottom Layer w10: v1(945,2085) 945,2035.96 1024.06,1956.9 U5.52@1024.06,1910 ; v1(1150,2190) 1155,2185 v1@1309.4,2185
OUTPUT_ENB: CN1.12 U5.33 | length 899.7
  Top Layer w10: CN1.12@100,1835 150,1785 330,1785 525,1590 760,1590 v1(775,1575)
  Bottom Layer w10: v1(775,1575) 775.21,1575 831.94,1518.27 U5.33@868.54,1518.27
OUTPUT_LED: R13.1 U5.27 | length 3591.1
  Top Layer w10: v1(1775,1265) 1775,1010 1880,905 2025,905 ; 2035.5,905 2025,905 ; v1(4035,545) 3600,545 3485,660 2805,660 2525.95,939.05 2208.55,939.05 2175,905.5 2024.5,905.5 2025,905
  Bottom Layer w10: U5.27@1063.42,1421.81 1064.33,1420.91 1064.33,1387.44 1171.77,1280 ; 1171.77,1278 1181.77,1268 1772,1268 v1(1775,1265) ; v1(4035,545) R13.1@4083.5,545
Spare1: CN1.2 U5.55 | length 1016.6
  Top Layer w10: CN1.2@200,2035 233,2002 603,2002 640,1965 720,1965 750,1995 895,1995 935,2035 v1(990,2035)
  Bottom Layer w10: v1@992.16,2032.16 992.16,2012.84 1045,1960 1059.92,1960 1082.2,1937.72 1082.2,1910.91 U5.55@1083.11,1910
Spare2: CN1.1 U5.56 | length 1092.8
  Top Layer w10: CN1.1@200,2135 210,2125 700,2125 720,2105 720,2065 755,2030 905.96,2030 929.96,2054 960.77,2054 976.77,2070 1020,2070 v1(1065,2025)
  Bottom Layer w10: v1@1065,2020 1065,1985 1101.89,1948.11 1101.89,1910.91 U5.56@1102.8,1910
SPI_MOSI_1: U2.8 U5.23 | length 1381.8
  Top Layer w10: v1(1142.16,1662.16) 1142.16,1667.04 1155,1679.87 v1(1155,1730) ; v1@1270,1720 1280,1730 1318.75,1730 1408.75,1820 v1(1420,1820)
  Bottom Layer w10: U5.23@1142.16,1421.81 v1(1142.16,1662.16) ; v1(1155,1730) v1(1270,1730) ; v1(1420,1820) 1425.96,1820 1760.96,2155 1915.79,2155 U2.8@2005.79,2244.99
SPI_NSS_1: U2.17 U5.20 | length 1179.1
  Top Layer w10: U2.17@1105,2363.1 1105,2370 1150,2415 1233.25,2415 1256,2392.25 1256,1856 1225,1825 v1(1225,1620)
  Bottom Layer w10: U5.20@1201.22,1421.81 1201.22,1531.22 1225,1555 v1(1225,1620)
SPI_SCK_1: U2.7 U5.21 | length 1386.1
  Top Layer w10: v1@1265,1660 1286.77,1660 1401.77,1775 v1(1415,1775)
  Bottom Layer w10: U5.21@1181.54,1421.81 1181.54,1636.53 1205,1660 v1(1255,1660) ; v1(1415,1775) 1495,1855 1495,1865 1750,2120 1980,2120 U2.7@2105,2244.99
TCK/SWDCLK: R29.2 U5.49 | length 469.1
  Top Layer w10: v1(735,1935) 760,1960 v1(935,1960)
  Bottom Layer w10: R29.2@570,1998.5 570,1990 625,1935 v1(735,1935) ; v1(935,1960) 965,1930 U5.49@965,1910
TMS/SWDIO: R30.2 U5.46 | length 461.4
  Bottom Layer w10: R30.2@505,1998.5 520,1983.5 520,1975 720.83,1774.17 U5.46@868.54,1774.17
UART_RX_2: U5.17 UART_RX.1 | length 2404.8
  Top Layer w10: v1(1190,1155) 1190,1315 v1(1296.81,1421.81) ; v1@2540,640 2550,640 2710,480 v1(2770,480)
  Bottom Layer w10: v1(1190,1155) 1580,1155 1950,785 2240,785 2385,640 v1(2545,640) ; U5.17@1260.28,1421.81 v1(1296.81,1421.81) v1@1300,1425 ; v1(2770,480) 2845,480 UART_RX.1@2925,400
UART_TX_2: U5.16 UART_TX.1 | length 2496.2
  Top Layer w10: v1(1140,1125) 1140,1301.77 1323.23,1485 v1(1360,1485) ; v1(2547,595) v1(2660,482)
  Bottom Layer w10: v1(1140,1125) 1146.5,1118.5 1506.5,1118.5 1885,740 2165,740 2310,595 v1(2547,595) ; U5.16@1356.73,1518.27 1358.51,1520.05 1360,1518.56 v1(1360,1485) ; v1(2660,482) 2731.23,482 2759.23,454 2771,454 UART_TX.1@2825,400
USBDM: C30.1 R35.2 U5.44 | length 1082.2
  Bottom Layer w10: R35.2@475,1085 R35.2@495.43,1085 ; R35.2@480.43,1075 R35.2@495,1060.43 ; C30.1@490,1004.57 R35.2@490,1060.43 ; R35.2@495.43,1070 515,1070 540,1095 540,1670 604.8,1734.8 U5.44@868.54,1734.8
USBDP: C29.1 R36.2 R47.1 U5.45 | length 970.4
  Bottom Layer w10: R47.1@414.57,1325 454.64,1284.93 475.07,1284.93 485,1275 R36.2@485,1174.13 ; 425,1355 425,1610 569.49,1754.49 U5.45@868.54,1754.49 ; R36.2@480.87,1160 R36.2@495,1174.13
V_ENC_A: C37.1 R41.2 U1.21 | length 1812.7
  Top Layer w10: v1(2823.46,1870) 2865,1870 v1(3045,2050)
  Bottom Layer w10: U1.21@2380,1380 2480,1380 2675,1575 2675,1745 2800,1870 v1(2823.46,1870) ; v1(3045,2050) 3046.5,2051.5 C37.1@3745,2051.5 R41.2@3815,2051.5
V_ENC_B: C36.1 R43.2 U1.22 | length 3233.7
  Top Layer w10: v1(2760,1880) 2890,2010 v1(2893.75,2010) ; v1(4585,1750) 4585,1925 4702.5,2042.5 v1@4712.5,2042.5
  Bottom Layer w10: U1.22@2380,1430 2450,1430 2615,1595 2615,1735 v1(2760,1880) ; v1(2893.75,2010) 3465,2010 3725,1750 v1(4585,1750) ; v1(4710,2045) 4785,2120 C36.1@4785,2163.5 R43.2@4705,2163.5 R43.2@4717.72,2150.79
V_ENC_SW: C40.1 R42.1 U1.23 | length 2210.8
  Bottom Layer w10: U1.23@2407.56,1480 U1.23@2380,1480 2315,1480 2250,1545 2250,1830 2525,2105 3565,2105 3703.5,2243.5 C40.1@3740,2243.5 R42.1@3820,2243.5
VIN_CHK: C32.1 R23.1 R37.2 U5.14 | length 1840.4
  Top Layer w10: v1(1295,840) 1295,1165 1405,1275 v1(1405,1410)
  Bottom Layer w10: C32.1@425,748.5 R37.2@500,748.5 ; 520,750 521.5,748.5 R23.1@555,748.5 ; R23.1@556.52,736.99 570,736.99 570,705 650,625 1100,625 1295,820 v1(1295,840) ; R23.1@561.52,741.99 R23.1@555,748.5 ; R23.1@570,748.5 R23.1@555,748.5 ; U5.14@1356.73,1557.64 1357.64,1556.73 1388.27,1556.73 1405,1540 v1(1405,1410)
pads on no net: CN1.4 CN5.1 CN5.4 P2.3 P2.6 P2.8 U1.1 U1.2 U1.3 U1.4 U1.5 U1.6 U1.7 U1.8 U1.11 U1.14 U1.28 U2.1@96.73,2363.1 U2.3 U2.9 U2.15 U2.18 U5.2 U5.3 U5.4 U5.8 U5.9 U5.10 U5.11 U5.22 U5.24 U5.25 U5.37 U5.38 U5.39 U5.40 U5.41 U5.42 U5.43 U5.50 U5.51 U5.54 U8.7 U8.8 U8.9 U8.10 X1.2 X1.4
copper on no net: | length 148.2
  Top Layer w10: 1385,995 1520,995
  Bottom Layer w10: 2750.08,1680 2752.58,1677.5 ; 2750.08,1730 2756.89,1736.81
  other v1: 825,1475

## Polygon pours and split planes (outlines as drawn)
GND on Top Layer "Top Layer-GND" (solid, pour order 12): -18.19,2449.76 5360,2449.76 5360,-20.24 -18.19,-20.24
GND on Bottom Layer "Bottom Layer-GND" (solid, pour order 10): -2.65,2459.34 5367.35,2459.34 5367.35,-10.66 180.25,-10.66 -2.65,-11.88

## Keep-outs
Keep-Out Layer:
  circle w10: c110,2360 r110
  circle w10: c120,125 r110
  circle w10: c5245,120 r110
  circle w10: c5245,2350 r110

## Other copper
Bottom Layer:
  rectangle net +VIN_SW: 60,1590 265,1765
  rectangle net NetC5_1: 4715,1010 4995,1220
  rectangle net NetC5_2: 5030,1015 5240,1220

## Silkscreen, mask and mechanical layers (free items; w line width, h text height)
Top Overlay:
  circle w10: c4290,300 r200
  circle w10: c3240,300 r200
  circle w10: c2425,300 r200
  circle w10: c1600,300 r200
  lines w30: 4885,1805 4942.5,1805 5057.5,1805 5115,1805 ; 4900,380 5050,380 5107.5,380 5130,380 ; 4995,1690 4995,1747.5 4995,1862.5 4995,1920
  text "Current Limit" at 4805,2075 h40
  text "Voltage" at 4090,1685 h60
  text "-" at 3535,955 h3
  text "Current" at 4090,845 h60
  text "Mem2" at 2310,275 h60
  text "Mem1" at 3140,275 h60
  text "ON/OFF" at 1430,270 h60
  text "Output" at 4135,270 h60
Bottom Overlay:
  text "LPS_Display Board, Rev C" at 1510,2050 h50
  text "UART" at 2960,50 h60
Mechanical 1:
  lines w10: 0,0 0,2470 5365,2470 5365,0 0,0

## Text inside footprints (layer, text, board x,y; h text height)
CN1: Bottom Overlay "9" at 110,2220 h25 r90; Bottom Overlay "1" at 220,2215 h25 r90; Bottom Overlay "8" at 225,1360 h25 r90; Bottom Overlay "16" at 95,1365 h25 r90
CN4: Bottom Overlay "6" at 4665,1080 h50 r180; Bottom Overlay "10" at 5240,1080 h50 r180; Bottom Overlay "5" at 5240,1180 h50 r180; Bottom Overlay "1" at 4670,1180 h50 r180
P2: Bottom Overlay "1" at 596.93,2146.38 h25
U2: Top Overlay "Newhaven Display NHD-3.12-25664UCxx" at 913.27,1507.59 h39.37; Top Overlay "Top View" at 1625.87,1852.08 h39.37; Top Overlay "1" at 2783.74,2343.41 h39.37; Top Overlay "20" at 720,2405 h39.37